# EAGLE board SparkFun_SSOP16_Breakout_v10 (EAGLE 7.2.0)
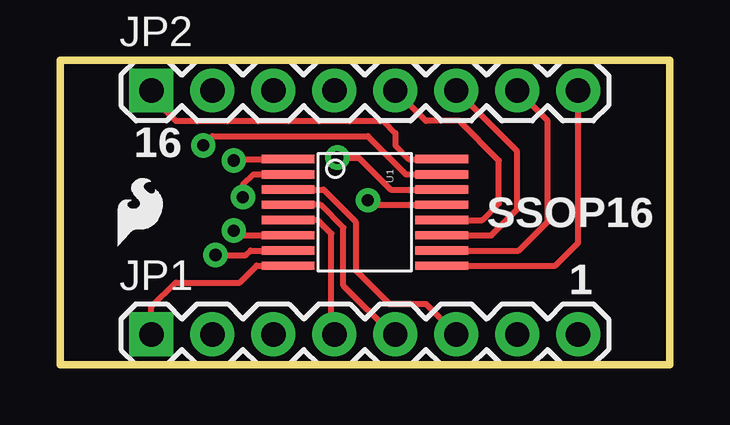
[diagram p0: board, top side]
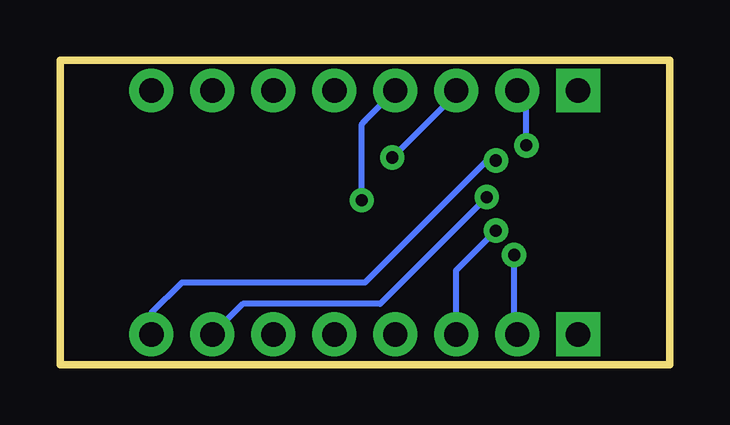
[diagram p1: board, bottom side, seen from below]

Size 25.4 x 12.7 mm. Coordinates in mm from the lower left corner, seen from the top.
Outline: 0,0 25.4,0 25.4,12.7 0,12.7 0,0
Copper layers (1*16): Top 0.035mm / dielectric 1.5mm / Bottom 0.035mm
Design rules "SparkFun": minimum track width 8mil, minimum drill 20mil, track to track 8mil, track to pad 8mil, pad to pad 8mil, via to via 8mil, smd to smd 8mil, copper to edge 10mil, drill to drill 8mil, minimum pad ring 12mil, minimum via ring 10mil, stop-mask expansion 4mil, vias tented up to drill 25mil, thermal gap 10mil

## Footprints (pad centres in the part's own frame; a part is rotated, then mirrored left to right if it is on the bottom)
1X08 = drill 1.016 pad 1.829 square: 1 0,0 | drill 1.016 pad 1.829: 2 2.54,0; 3 5.08,0; 4 7.62,0; 5 10.16,0; 6 12.7,0; 7 15.24,0; 8 17.78,0
SSOP16 = smd 0.35 x 2.2: P$1 -2.223,-3.2; P$2 -1.587,-3.2; P$3 -0.953,-3.2; P$4 -0.318,-3.2; P$5 0.318,-3.2; P$6 0.953,-3.2; P$7 1.587,-3.2; P$8 2.223,-3.2; P$9 2.223,3.2; P$10 1.587,3.2; P$11 0.953,3.2; P$12 0.318,3.2; P$13 -0.318,3.2; P$14 -0.953,3.2; P$15 -1.587,3.2; P$16 -2.223,3.2

## Placement (x,y rotation side)
JP1  [1X08]  3.81,1.27 0 top
JP2  [1X08]  3.81,11.43 0 top
U1  SSOP16  [SSOP16]  12.7,6.35 270 top
U$1  LOGO-SFESK  [SFE-LOGO-FLAME]  2.41,4.95 0 top

## Library data of the parts
JP1 JP2 U1 U$1 = SparkFun

## Nets
N$1: JP1.1 U1.P$8
N$2: JP1.2 U1.P$7
N$3: JP1.3 U1.P$6
N$4: JP1.4 U1.P$5
N$5: JP1.5 U1.P$4
N$6: JP1.6 U1.P$3
N$7: JP1.7 U1.P$2
N$8: JP1.8 U1.P$1
N$9: JP2.1 U1.P$16
N$10: JP2.2 U1.P$15
N$11: JP2.3 U1.P$14
N$12: JP2.4 U1.P$13
N$13: JP2.5 U1.P$12
N$14: JP2.6 U1.P$11
N$15: JP2.7 U1.P$10
N$16: JP2.8 U1.P$9

## Tracks (layer width: path | path; a pad name or v marks a point on that pad's centre or on a via)
N$1
  Top 0.254: 3.81,1.14 JP1.1 3.81,2.41 4.83,3.43 7.49,3.43 8.19,4.13 U1.P$8
N$2  (via drill 0.51)
  Top 0.254: U1.P$7 7.94,4.76 7.75,4.57 v6.48,4.57
  Bottom 0.254: v6.48,4.57 6.48,1.4 JP1.2
N$3  (via drill 0.51)
  Top 0.254: U1.P$6 7.43,5.4 v7.24,5.59
  Bottom 0.254: 9.02,1.14 JP1.3 8.89,3.94 v7.24,5.59
N$4
  Top 0.254: JP1.4 11.3,1.4 11.3,5.46 10.73,6.03 U1.P$5
N$5
  Top 0.254: JP1.5 13.84,1.27 11.81,3.3 11.81,5.71 10.86,6.67 U1.P$4
N$6
  Top 0.254: JP1.6 15.24,2.54 13.72,2.54 12.32,3.94 12.32,5.97 10.99,7.3 U1.P$3
N$7  (via drill 0.51)
  Top 0.254: U1.P$2 8.06,7.94 7.62,7.49 v7.62,6.99
  Bottom 0.254: v7.62,6.99 12.06,2.54 17.78,2.54 JP1.7
N$8  (via drill 0.51)
  Top 0.254: U1.P$1 7.3,8.57 v7.24,8.51
  Bottom 0.254: v7.24,8.51 7.62,8.51 12.7,3.43 20.32,3.43 21.59,2.16 JP1.8
N$9
  Top 0.254: U1.P$16 14.54,8.57 13.97,9.14 13.97,9.65 13.46,10.16 4.83,10.16 3.68,11.3 JP2.1
N$10  (via drill 0.51)
  Top 0.254: U1.P$15 14.41,7.94 12.83,9.53 6.35,9.53 v5.97,9.14
  Bottom 0.254: v5.97,9.14 5.97,11.05 JP2.2
N$11  (via drill 0.51)
  Top 0.254: U1.P$14 13.78,7.3 12.45,8.64 v11.56,8.64
  Bottom 0.254: JP2.3 8.89,11.3 v11.56,8.64
N$12  (via drill 0.51)
  Top 0.254: U1.P$13 13.02,6.67 v12.83,6.86
  Bottom 0.254: JP2.4 12.7,10.16 12.83,10.03 v12.83,6.86
N$13
  Top 0.254: U1.P$12 17.59,6.03 18.29,6.73 18.29,8.51 16.64,10.16 15.24,10.16 JP2.5
N$14
  Top 0.254: U1.P$11 17.97,5.4 19.05,6.48 19.05,8.89 JP2.6
N$15
  Top 0.254: U1.P$10 19.11,4.76 20.32,5.97 20.32,10.16 JP2.7
N$16
  Top 0.254: U1.P$9 20.64,4.13 21.59,5.08 JP2.8

## Text on the board
tPlace: 16 | SSOP16 | 1